# Allegro board SMA_fabB.brd
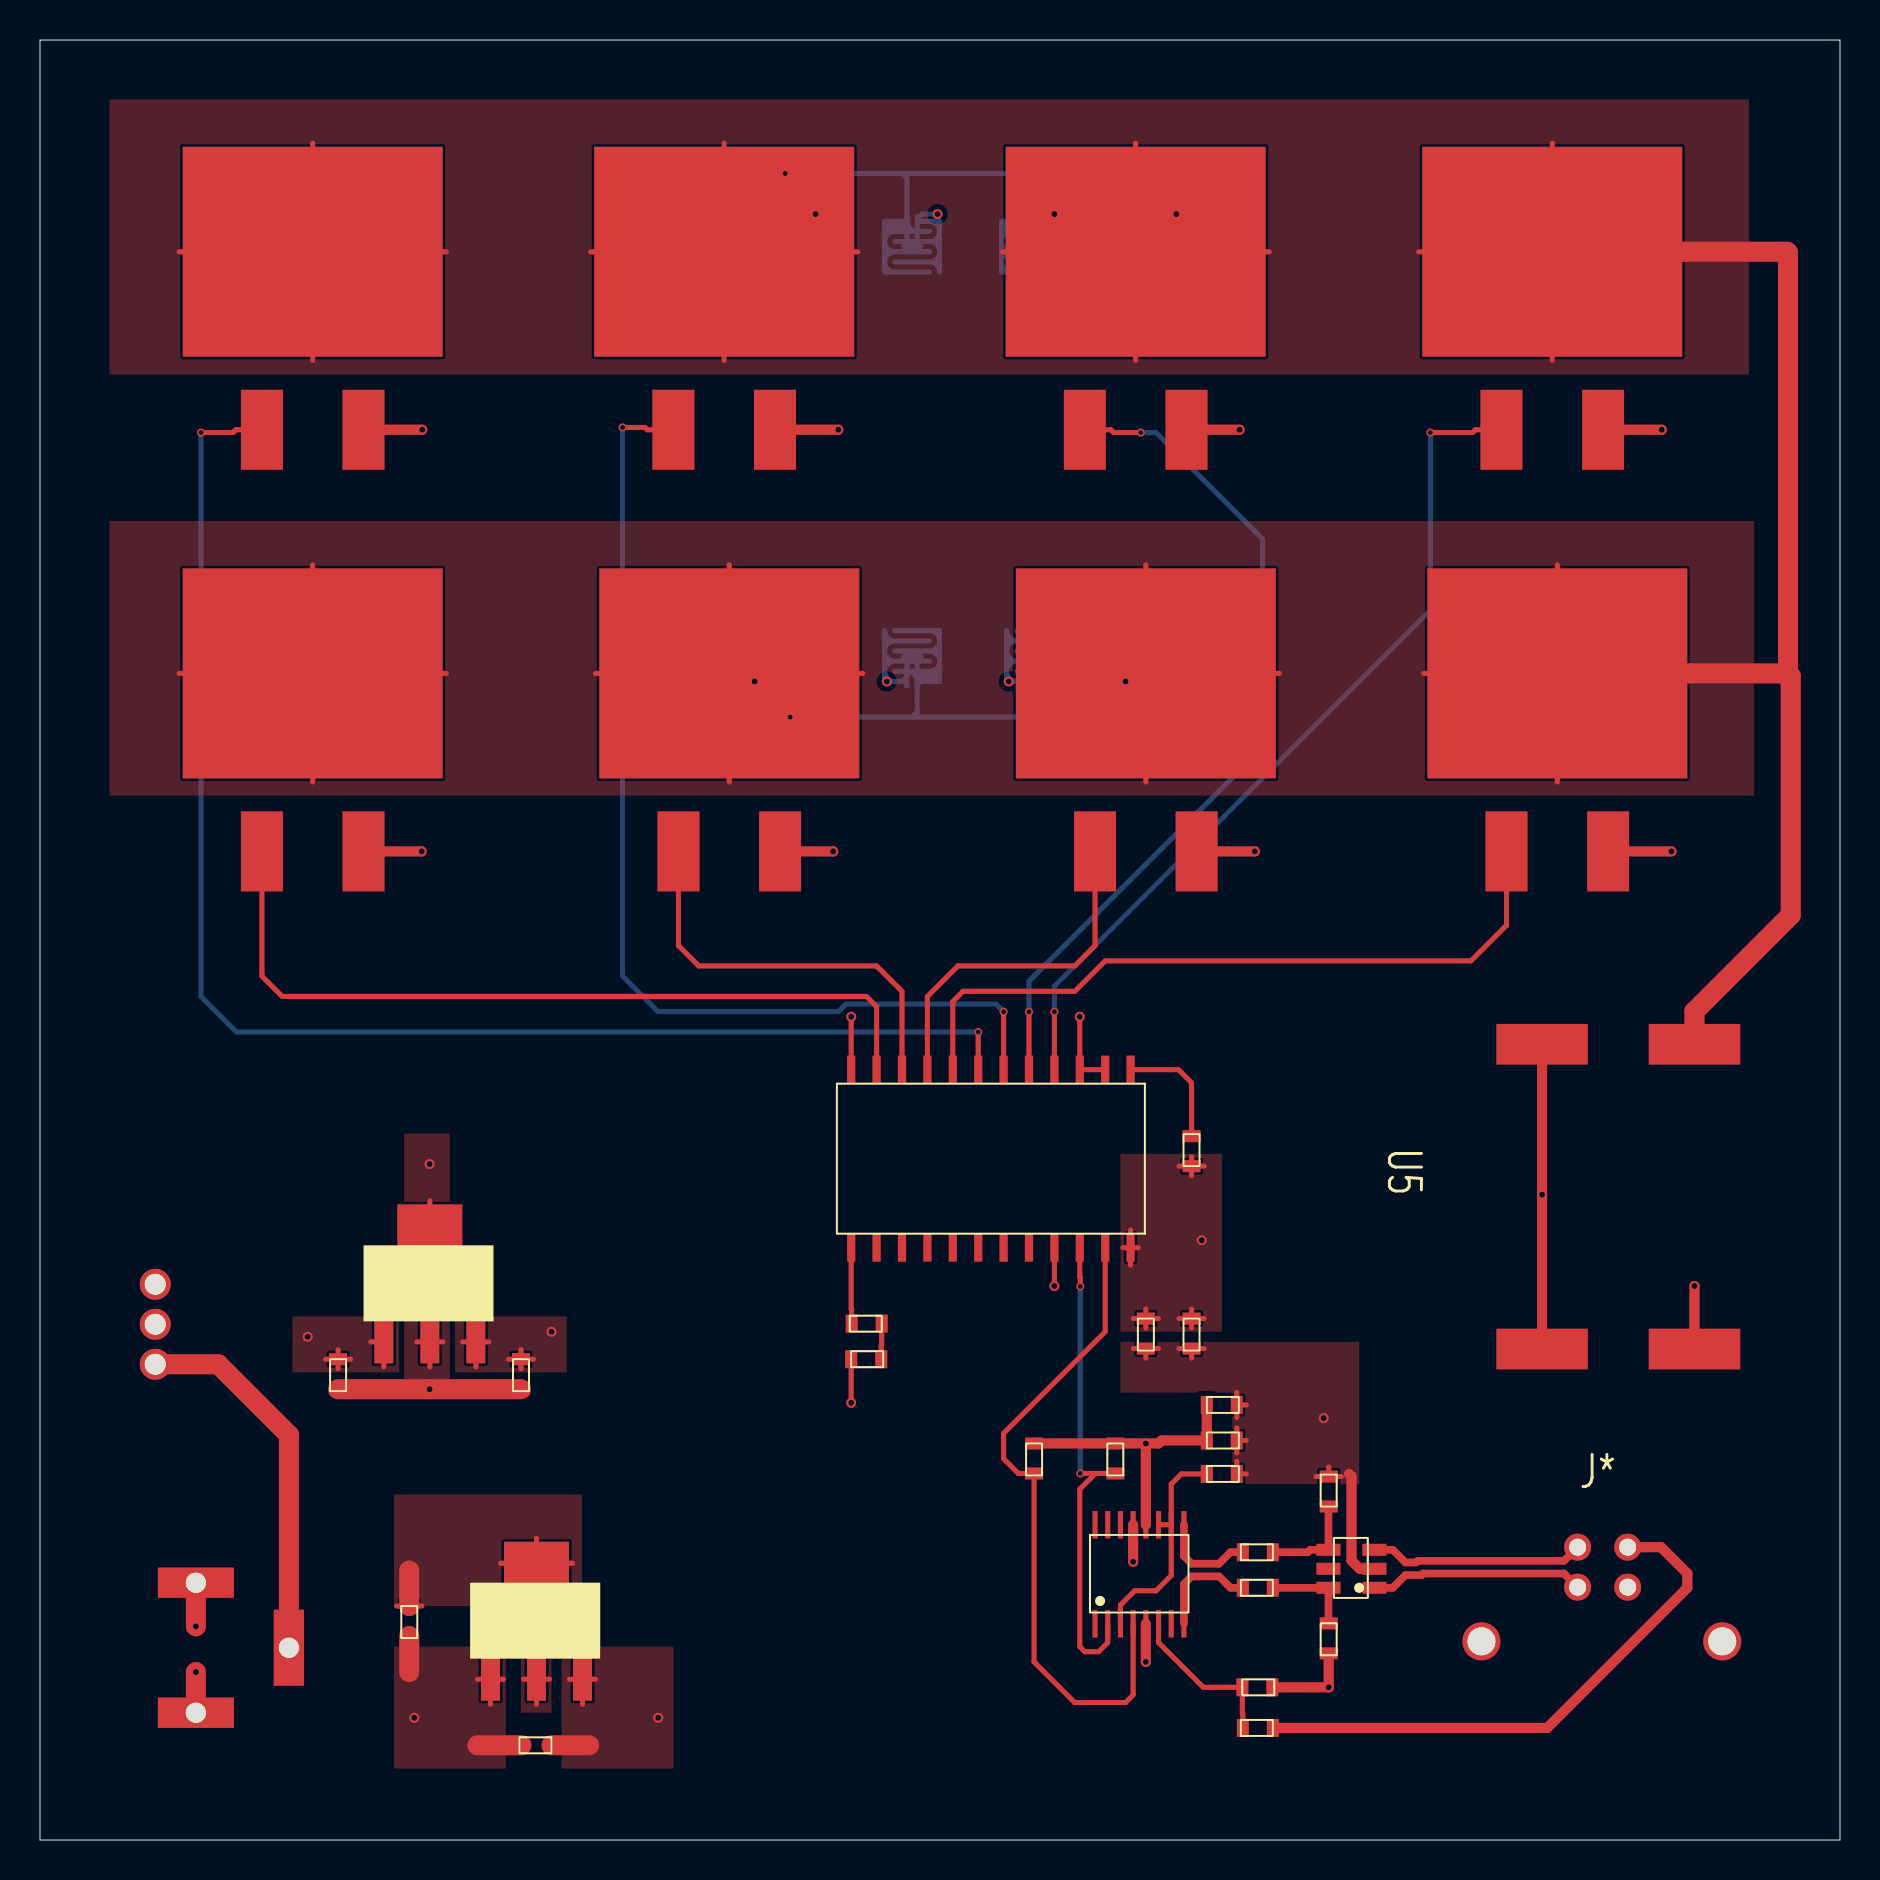
[diagram p0: board, top side]
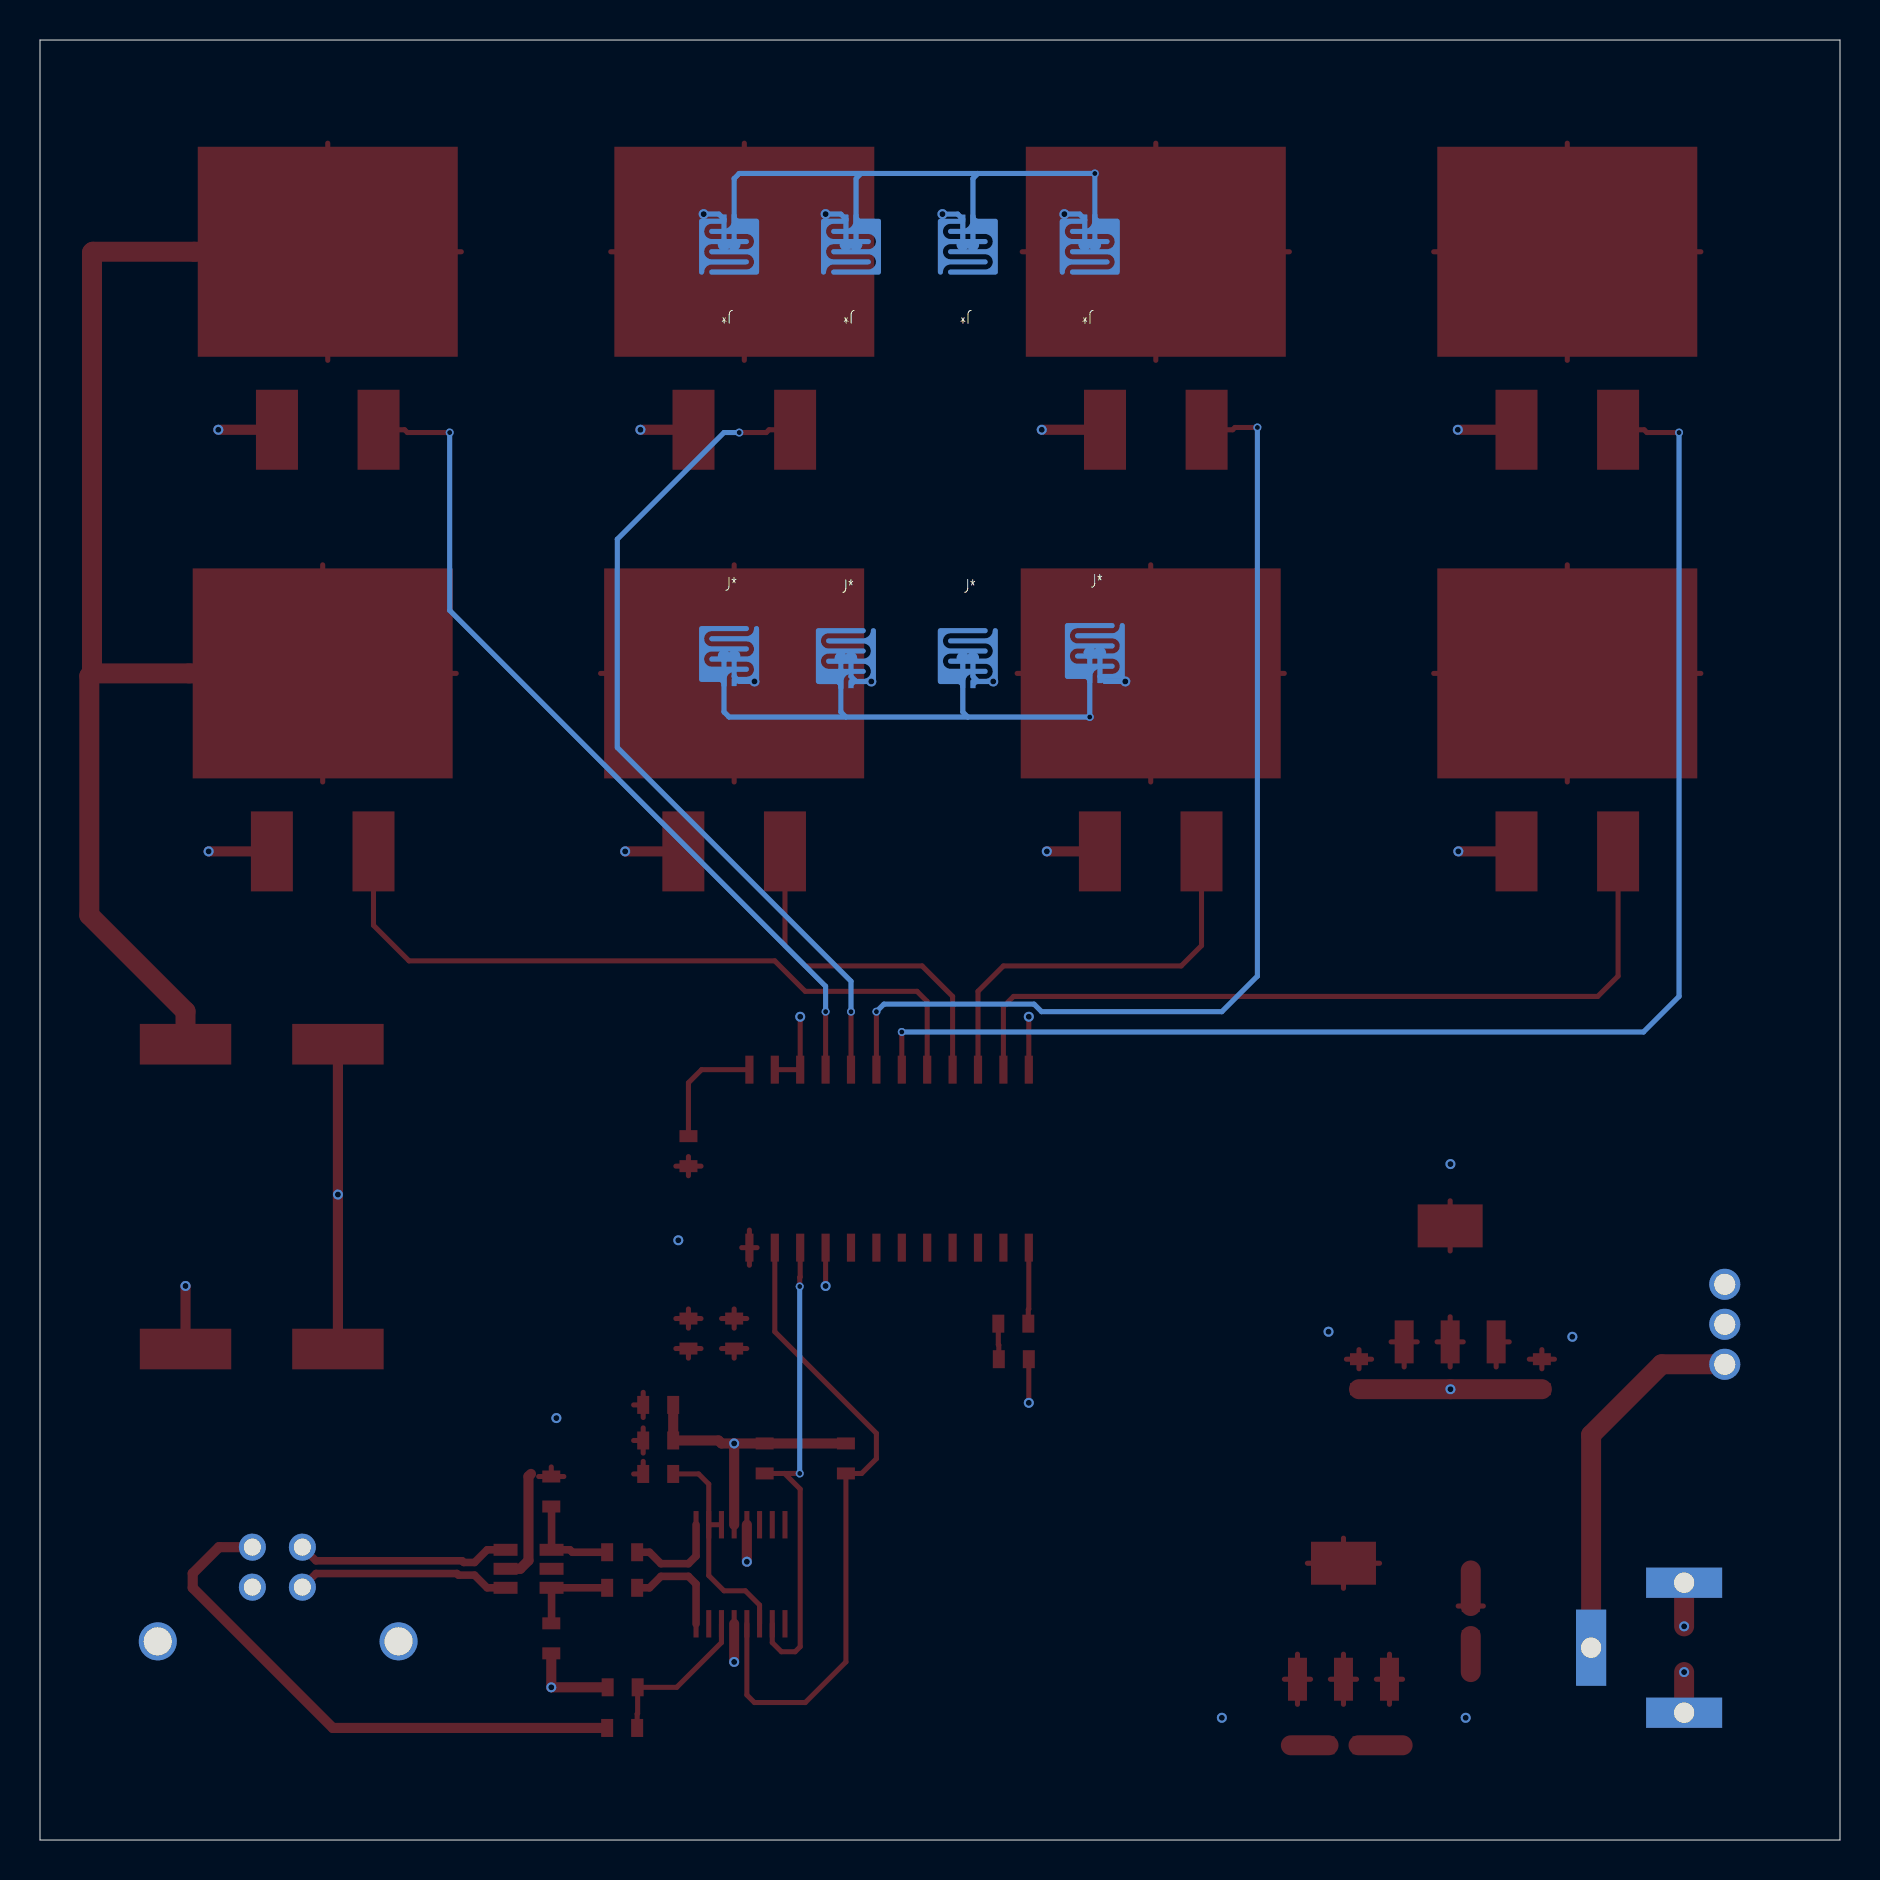
[diagram p1: board, bottom side, seen from below]

Outline 90 x 90 mm; copper layers: TOP, GND, VDD, BOTTOM. Coordinates in mm from the lower left corner of the outline.
Outline path: 0,90 90,90 90,0 0,0 0,90

## Design rules (mm)
constraint set DEFAULT: min track width 0.254, pair gap 0.5
net group USB: nets USB_D+ USB_D-
net group USB_CONN: nets USB_D+_CONN USB_D-_CONN
net group USB_FT: nets FT_D+ FT_D-

## Placement (name value [footprint] x y rotation side)
C5  0.33uF  [0603_R]  14.91 24.04 270 top
C6  0.1uF  [0603_R]  24.05 24.04 270 top
C7  1uF  [0603_R]  25.57 4.74 180 top
C8  1uF  [0603_R]  18.46 11.7 270 top
C9  47pF  [0603_R]  64.44 16.67 90 top
C10  47pF  [0603_R]  64.44 10.83 270 top
C11  47pF  [0603_R]  58.34 18.3 0 top
C12  4.7uF  [0603_R]  58.34 19.98 0 top
C13  0.1uF  [0603_R]  58.34 21.75 0 top
C16  1uF  [0603_R]  55.29 26.07 270 top
C17  0.1uF  [0603_R]  57.58 26.07 270 top
D2  -  [USBLC6-2SC6]  66.72 12.61 90 top
D4  LED  [0603_R]  40.56 24.04 0 top
J3  EJ503A_0  [EJ503A]  7.79 12.86 0 top
J4  OS102011MS2QN1_1  [OS102011MS2QN1]  5.76 23.79 90 top
J5  au-y1007  [AU-Y1007]  76.88 14.64 0 top
J6  comb_electrode  [COMB_ELECTRODE_FULL]  37.51 78.75 0 bottom
J7  comb_electrode  [COMB_ELECTRODE_FULL]  49.45 78.75 0 bottom
J8  comb_electrode  [COMB_ELECTRODE_FULL]  43.61 78.75 0 bottom
J9  comb_electrode  [COMB_ELECTRODE_FULL]  55.55 78.75 0 bottom
J10  comb_electrode  [COMB_ELECTRODE_FULL]  55.55 60.21 180 bottom
J11  comb_electrode  [COMB_ELECTRODE_FULL]  49.7 60.11 180 bottom
J12  comb_electrode  [COMB_ELECTRODE_FULL]  43.61 60.11 180 bottom
J13  comb_electrode  [COMB_ELECTRODE_FULL]  37.26 60.36 180 bottom
Q1  -  [STFW3N150]  75.61 79.41 0 top
Q2  -  [STFW3N150]  54.78 79.41 0 top
Q3  -  [STFW3N150]  34.21 79.41 0 top
Q4  -  [STFW3N150]  13.64 79.41 0 top
Q5  -  [STFW3N150]  13.64 58.33 0 top
Q6  -  [STFW3N150]  34.46 58.33 0 top
Q7  -  [STFW3N150]  55.29 58.33 0 top
Q8  -  [STFW3N150]  75.87 58.33 0 top
R3  27  [0603_R]  61.64 14.39 180 top
R4  27  [0603_R]  61.64 12.61 180 top
R5  4.7k  [0603_R]  61.64 5.6 180 top
R6  10k  [0603_R]  60.12 7.63 0 top
R7  10k  [0603_R]  53.77 19.83 270 top
R8  10k  [0603_R]  49.7 19.83 270 top
R12  1k  [0603_R]  57.58 33.69 90 top
R13  1k  [0603_R]  42.08 25.82 180 top
U3  -  [UA78M05CDCY]  17.19 24.91 0 top
U4  TLV1117LV33DCYT_1  [TLV1117LV33DCYT]  22.53 8.04 0 top
U5  -  [B00JVJDEZE]  80.18 39.79 270 top
U6  FT-201X  [FT201X]  52.75 15.76 0 top
U8  -  [PCF8575DW]  54.53 38.52 270 top

## Library data of the parts
C5-C13 C16 C17 = CAP
D2 = USBLC6-2SC6_1
D4 = LED
J3 = EJ503A_0
J4 = OS102011MS2QN1_1
J5 = au-y1007_0
J6-J13 = comb_electrode
Q1-Q8 = MOSFET N
R3-R8 R12 R13 = RESISTOR
U3 = UA78M05CDCY_0
U4 = TLV1117LV33DCYT_2
U5 = B00JVJDEZE
U6 = FT-201X_1
U8 = PCF8575DW

## Footprints (pads in the part's own frame, mm; a bottom-side part is the same pattern mirrored in y, then rotated)
0603_R
  rect 0.6x0.9 smd: 1(0,0) 2(1.5,0)
AU-Y1007
  round 1.9 hole 1.4: (-4.81,-4.71) (7.23,-4.71)
  round 1.35 hole 0.85: 1(2.5,0) 2(0,0) 3(0,-2) 4(2.5,-2)
B00JVJDEZE
  rect 2.032x4.572 smd: 1(15.24,2.54) 2(0,-5.08) 3(0,2.54) 4(15.24,-5.08)
COMB_ELECTRODE_FULL
  custom 2.492x3 smd: 1(-0.254,-1.016)
  custom 2.491x3 smd: 2(0.254,-1.016)
EJ503A
  rect 1.51x3.8 hole 1.01: 1(4.65,-3.25)
  rect 3.8x1.51 hole 1.01: 2(0,0) 3(0,-6.5)
FT201X
  rect 0.254x1.37 smd: 1(0,-4.953) 2(0.635,-4.953) 3(1.27,-4.953) 4(1.905,-4.953) 5(2.54,-4.953) 6(3.175,-4.953) 7(3.81,-4.953) 8(4.445,-4.953) 9(4.445,0) 10(3.81,0) 11(3.175,0) 12(2.54,0) 13(1.905,0) 14(1.27,0) 15(0.635,0) 16(0,0)
OS102011MS2QN1
  round 0 hole 1.75: (-2.1,0) (6.1,0)
  round 1.55 hole 1.05: 1(0,0) 2(2,0) 3(4,0)
PCF8575DW
  rect 1.4x0.41 smd: 1(0,0) 2(0,-1.27) 3(0,-2.54) 4(0,-3.81) 5(0,-5.08) 6(0,-6.35) 7(0,-7.62) 8(0,-8.89) 9(0,-10.16) 10(0,-11.43) 11(0,-12.7) 12(0,-13.97) 13(8.9,-13.97) 14(8.9,-12.7) 15(8.9,-11.43) 16(8.9,-10.16) 17(8.9,-8.89) 18(8.9,-7.62) 19(8.9,-6.35) 20(8.9,-5.08) 21(8.9,-3.81) 22(8.9,-2.54) 23(8.9,-1.27) 24(8.9,0)
STFW3N150
  rect 2.1x4 smd: 1(-2.54,-8.9) 3(2.54,-8.9)
  rect 13x10.5 smd: 2(0,0)
TLV1117LV33DCYT
  rect 0.95x2.15 smd: 1(0,0) 2(2.3,0) 3(4.6,0)
  rect 3.25x2.15 smd: 4(2.3,5.8)
UA78M05CDCY
  rect 0.95x2.15 smd: 1(0,0) 2(2.3,0) 3(4.6,0)
  rect 3.25x2.15 smd: 4(2.3,5.8)
USBLC6-2SC6
  rect 0.6x1.2 smd: 1(0,0) 2(0.95,0) 3(1.9,0) 4(1.9,2.3) 5(0.95,2.3) 6(0,2.3)

## Nets
+3V3: C8.1 U4.2 U4.4(VOUT_TAB)
+5V: C6.1 C7.1 C12.1 C13.1 C16.1 C17.1 D4.1 R7.1 R8.1 R12.1 U3.3(VOUT) U4.3 U5.1 U6.12 U8.24(VCC)
+12V: C5.1 J4.2 J4.3 U3.1
+12V_SW: J3.1 J4.1
GND: C5.2 C6.2 C7.2 C8.2 C9.2 C10.2 C11.2 C12.2 C13.2 C16.2 C17.2 D2.2 J3.2(V-) J3.3 J5.4 J6.2(-) J7.2(-) J8.2(-) J9.2(-) J10.2(-) J11.2(-) J12.2(-) J13.2(-) Q1.3(SOURCE) Q2.3(SOURCE) Q3.3(SOURCE) Q4.3(SOURCE) Q5.3(SOURCE) Q6.3(SOURCE) Q7.3(SOURCE) Q8.3(SOURCE) R6.2 U3.2 U3.4 U4.1 U5.2 U5.4(VOUT-) U6.5 U6.13 U8.2 U8.3 U8.12 U8.21
E0_ON: Q1.1 U8.4
E1_ON: Q2.1 U8.5
E2_ON: Q3.1 U8.6
E3_ON: Q4.1 U8.7
E4_ON: Q8.1 U8.8
E5_ON: Q7.1 U8.9
E6_ON: Q6.1 U8.10
E7_ON: Q5.1 U8.11
E9_ON: U8.14
E10_ON: U8.15
E11_ON: U8.16
E12_ON: U8.17
E13_ON: U8.18
E14_ON: U8.19
E15_ON: U8.20
FT_D+: R4.2 U6.8
FT_D-: R3.2 U6.9
I2C_SCL: R7.2 U6.2 U8.22
I2C_SDA: R8.2 U6.4 U8.23
USB_D+: C10.1 D2.6 R4.1
USB_D+_CONN: D2.1 J5.3
USB_D-: C9.1 D2.4 R3.1
USB_D-_CONN: D2.3 J5.2
V_STAT: J6.1 J7.1 J8.1 J9.1 J10.1 J11.1 J12.1 J13.1 Q1.2 Q2.2 Q3.2 Q4.2 Q5.2 Q6.2 Q7.2 Q8.2 U5.3
V_USB: D2.5(VBUS) J5.1(VCC) R5.1
N04930: R5.2 R6.1 U6.6
N05131: C11.1 U6.3(VCCIO) U6.10 U6.11
N09716: R12.2 U8.1
N09730: D4.2(CATHODE) R13.1
N09800: R13.2 U8.13

Pads without a net: U6 1 7 14 15 16

## Via types
v1: diameter 0.4, hole 0.25, TOP to BOTTOM, 12 vias
v2: diameter 0.5, hole 0.3, TOP to BOTTOM, 36 vias

## Routing (per net, layer and track width the routed paths; a pad name or vN(x,y) marks a point on that pad's centre or on a via; arc(x,y) is an arc through that point)
+3V3: length 13
  TOP w0.254: U4.2 25.48,8.04 ; U4.2 24.83,9.29 ; U4.2 24.17,8.04 ; U4.2 24.83,6.79 ; 19.09,11.7 C8.1 17.83,11.7 ; 24.83,12.59 U4.4 ; U4.4 24.83,15.09 ; U4.4 23.02,13.84 ; U4.4 26.63,13.84
  TOP w1: C8.1 18.46,13.48
+5V: length 39.5
  TOP w0.254: 21.14,24.91 U3.3 ; U3.3 21.79,23.65 ; U3.3 22.45,24.91 ; C17.1 58.21,26.07 ; C17.1 57.58,26.55 ; C17.1 57.58,25.59 ; C17.1 56.95,26.07 ; 54.15,29.62 U8.24 ; U8.24 54.91,29.62 ; U8.24 54.53,30.5 ; U8.24 54.53,28.74 ; 24.05,23.56 C6.1 ; C6.1 24.05,24.52 ; C6.1 24.68,24.04 ; C6.1 23.42,24.04 ; 26.47,8.04 U4.3 ; U4.3 27.13,6.79 ; U4.3 27.78,8.04 ; U4.3 27.13,9.29 ; C16.1 55.92,26.07 ; C16.1 55.29,26.55 ; C16.1 54.66,26.07 ; C16.1 55.29,25.59 ; 56.95,33.69 R12.1 ; R12.1 58.21,33.69 ; R12.1 57.58,33.21 ; R12.1 57.58,34.17 ; D4.1 v2(40.56,21.86)
  TOP w0.508: R8.1 R7.1 v2(55.29,19.83) ; U6.12 v2(55.29,19.83) ; v2(55.29,19.83) 55.92,19.83 56.07,19.98 C12.1 C13.1 ; U5.1 v2(82.72,27.7)
  TOP w1: C7.1 27.46,4.74
  vias: v2(25.57,25.41) v2(30.91,6.11) v2(58.09,29.99)
+12V: length 10.8
  TOP w0.254: 16.54,24.91 U3.1 17.19,23.65 ; 14.28,24.04 C5.1 ; C5.1 14.91,23.56 ; C5.1 14.91,24.52 ; C5.1 15.53,24.04
  VDD w0.254: 4.81,27.79 J4.3 ; J4.3 5.76,26.83 ; J4.3 6.72,27.79 ; J4.3 5.76,28.74 ; J4.2 6.72,25.79 ; J4.2 5.76,26.74 ; J4.2 4.81,25.79
  vias: v2(13.38,25.16)
+12V_SW: length 18.8
  TOP w1: J3.1 12.44,20.26 8.91,23.79 J4.1
GND: length 138.6
  TOP w0.254: 18.84,24.91 U3.2 ; U3.2 19.49,23.65 ; U3.2 20.15,24.91 ; U3.2 19.49,26.16 ; U4.1 22.53,9.29 ; U4.1 22.53,6.79 ; U4.1 23.18,8.04 ; U4.1 21.87,8.04 ; 59.84,19.35 C12.2 ; C12.2 59.84,20.6 ; C12.2 60.32,19.98 ; 63.81,18.17 C9.2 ; C9.2 64.44,18.65 ; C9.2 65.06,18.17 ; 54.66,24.57 C16.2 ; C16.2 55.29,24.09 ; C16.2 55.92,24.57 ; 59.84,21.13 C13.2 ; C13.2 59.84,22.38 ; C13.2 60.32,21.75 ; 57.58,24.09 C17.2 ; C17.2 56.95,24.57 ; C17.2 58.21,24.57 ; v2(51.99,41.16) U8.3 U8.2 ; U8.21 v2(50.72,27.7) ; 19.49,31.96 U3.4 19.49,29.45 ; 60.32,18.3 C11.2 59.84,18.93 ; U8.12 v2(40.56,41.16)
  TOP w0.504: U6.5 v2(55.29,8.9)
  TOP w0.508: C10.2 v2(64.44,7.63) R6.2 ; 65.45,18.3 65.58,18.18 65.58,13.97 65.99,13.56 D2.2 ; Q5.3 v2(19.08,49.43) ; U5.4 v2(75.1,32.27) U5.2 ; Q8.3 v2(81.57,49.43) ; Q3.3 v2(39.91,70.51) ; Q6.3 v2(39.66,49.43) ; Q4.3 v2(19.11,70.51) ; U6.13 v2(54.66,13.91) ; Q2.3 v2(59.98,70.51) ; Q7.3 v2(60.74,49.43) ; Q1.3 v2(81.09,70.51)
  TOP w1: C7.2 21.87,4.74 ; C5.2 v2(19.48,22.54) C6.2 ; C8.2 18.46,8.4 ; J3.2 v2(7.79,10.68) ; J3.3 v2(7.79,8.4)
  GND w0.254: J3.2 7.79,13.8 ; J3.2 5.72,12.86 ; J3.2 7.79,11.93 ; J3.2 9.87,12.86 ; J3.3 9.87,6.36 ; J3.3 7.79,5.43 ; J3.3 7.79,7.3 ; J3.3 5.72,6.36 ; 79.38,11.79 J5.4 ; J5.4 78.53,12.64 ; J5.4 80.23,12.64 ; J5.4 79.38,13.49
  GND w1: 13.49,17.69 13.38,17.69 13.38,11.19
  BOTTOM w0.254: J11.2 49.45,58.18 49.2,57.93 v2(48.43,57.93) ; J10.2 55.29,58.18 55.04,57.93 v2(54.28,57.93) ; J13.2 37,58.18 36.75,57.93 v2(35.73,57.93) ; v2(50.72,81.29) 49.96,81.29 49.7,81.04 J7.2 ; J9.2 55.8,81.04 56.05,81.29 v2(56.82,81.29) ; J12.2 43.35,58.18 43.1,57.93 v2(42.34,57.93) ; v2(44.88,81.29) 44.12,81.29 43.86,81.04 J8.2 ; J6.2 37.77,81.04 38.02,81.29 v2(38.78,81.29)
  vias: v2(18.72,6.11) v2(19.48,33.8) v2(64.18,21.1)
E0_ON: length 43.3
  TOP w0.254: U8.4 v1(50.72,41.42) ; v1(69.52,70.37) 71.63,70.37 71.77,70.51 Q1.1
  BOTTOM w0.254: v1(69.52,70.37) 69.52,61.48 50.72,42.69 v1(50.72,41.42)
E1_ON: length 42.5
  TOP w0.254: U8.5 v1(49.45,41.42) ; v1(55.04,70.37) 53.69,70.37 53.55,70.51 Q2.1
  BOTTOM w0.254: v1(49.45,41.42) 49.45,42.94 61.13,54.62 61.13,65.04 55.8,70.37 v1(55.04,70.37)
E2_ON: length 53
  TOP w0.254: U8.6 v1(48.18,41.42) ; v1(29.13,70.63) 30.25,70.63 30.37,70.51 Q3.1
  BOTTOM w0.254: v1(29.13,70.63) 29.13,43.19 30.91,41.42 39.92,41.42 40.3,41.79 47.8,41.79 v1(48.18,41.42)
E3_ON: length 72.8
  TOP w0.254: v1(8.05,70.37) 9.65,70.37 9.79,70.51 Q4.1 ; U8.7 v1(46.91,40.4)
  BOTTOM w0.254: v1(8.05,70.37) 8.05,42.18 9.83,40.4 v1(46.91,40.4)
E4_ON: length 36.4
  TOP w0.254: Q8.1 73.33,45.73 71.55,43.96 53.26,43.96 51.74,42.43 46.15,42.43 45.64,41.92 U8.8
E5_ON: length 17.8
  TOP w0.254: Q7.1 52.75,44.72 51.74,43.7 45.89,43.7 44.37,42.18 U8.9
E6_ON: length 20.7
  TOP w0.254: U8.10 43.1,42.43 41.83,43.7 32.94,43.7 31.92,44.72 Q6.1
E7_ON: length 40.8
  TOP w0.254: Q5.1 11.1,43.19 12.11,42.18 41.32,42.18 41.83,41.67 U8.11
FT_D+: length 5.3
  TOP w0.381: R4.2 59.52,12.61 58.95,13.18 57.58,13.18 57.2,12.8 U6.8
FT_D-: length 4.9
  TOP w0.381: R3.2 59.52,14.39 58.95,13.82 57.58,13.82 57.2,14.2 U6.9
I2C_SCL: length 24.7
  TOP w0.254: U8.22 51.99,28.15 52.01,28.13 v1(52.01,27.68) ; 52.77,18.33 51.99,17.55 51.99,9.67 52.24,9.41 52.93,9.41 53.39,9.87 53.39,10.81 ; 52.77,18.33 v1(52.01,18.33) ; 52.77,18.33 R7.2
  BOTTOM w0.254: v1(52.01,18.33) v1(52.01,27.68)
I2C_SDA: length 33.4
  TOP w0.254: U6.4 54.66,7.25 54.28,6.87 51.74,6.87 49.7,8.9 R8.2 48.92,18.33 48.18,19.06 48.18,20.33 53.26,25.41 U8.23
USB_D+: length 4.6
  TOP w0.381: C10.1 64.42,10.85 D2.6 R4.1
USB_D+_CONN: length 10.7
  TOP w0.381: D2.1 67.64,12.61 68.27,13.24 69.07,13.24 69.16,13.32 76.2,13.32 J5.3
USB_D-: length 5
  TOP w0.381: C9.1 64.42,16.66 D2.4 63.5,14.51 63.38,14.39 R3.1
USB_D-_CONN: length 10.7
  TOP w0.381: J5.2 76.2,13.96 68.89,13.96 68.81,13.88 68.27,13.88 67.64,14.51 D2.3
V_STAT: length 301.4
  TOP w0.254: 48.11,79.41 Q2.2 ; Q2.2 61.46,79.41 ; Q2.2 54.78,73.98 ; Q2.2 54.78,84.84 ; Q8.2 75.87,63.76 ; Q8.2 75.87,52.9 ; Q8.2 69.19,58.33 ; 13.64,52.9 Q5.2 ; Q5.2 6.96,58.33 ; Q5.2 20.31,58.33 ; Q5.2 13.64,63.76 ; 68.93,79.41 Q1.2 ; Q1.2 75.61,84.84 ; Q1.2 75.61,73.98 ; 27.53,79.41 Q3.2 ; Q3.2 34.21,84.84 ; Q3.2 34.21,73.98 ; Q3.2 40.89,79.41 ; Q6.2 34.46,63.76 ; Q6.2 27.79,58.33 ; Q6.2 34.46,52.9 ; Q6.2 41.14,58.33 ; 55.29,52.9 Q7.2 ; Q7.2 61.97,58.33 ; Q7.2 55.29,63.76 ; 13.64,73.98 Q4.2 ; Q4.2 13.64,84.84 ; Q4.2 6.96,79.41 ; Q4.2 20.31,79.41
  TOP w1: 87.4,58.33 87.54,58.2 87.54,46.24 82.72,41.43 U5.3 ; 87.4,58.33 87.4,79.37 87.36,79.41 Q1.2 ; 87.4,58.33 Q8.2
  BOTTOM w0.254: J7.1 49.2,83.07 48.94,83.33 ; J9.1 55.29,83.07 55.04,83.33 48.94,83.33 ; J11.1 49.96,56.4 49.7,56.15 ; 49.7,56.15 55.55,56.15 55.8,56.4 J10.1 ; 49.7,56.15 43.61,56.15 ; 43.1,83.33 48.94,83.33 ; 43.1,83.33 43.35,83.07 J8.1 ; 43.1,83.33 v1(37.26,83.33) J6.1 ; 43.61,56.15 v1(37.51,56.15) J13.1 ; 43.61,56.15 43.86,56.4 J12.1
V_USB: length 27.9
  TOP w0.508: J5.1 81.05,14.64 82.36,13.33 82.36,12.61 75.36,5.6 R5.1
N04930: length 8.1
  TOP w0.254: U6.6 55.93,9.87 58.16,7.63 R6.1 60.12,6.33 60.14,6.31 R5.2
N05131: length 11.3
  TOP w0.254: U6.3 54.02,11.75 54.73,12.46 55.8,12.46 56.56,13.22 U6.10 ; U6.10 56.56,17.79 57.07,18.3 C11.1 ; U6.10 U6.11
N09716: length 6
  TOP w0.254: U8.1 56.92,38.52 57.58,37.86 R12.2
N09730: length 1.8
  TOP w0.254: R13.1 42.08,24.77 42.06,24.74 D4.2
N09800: length 3.8
  TOP w0.254: U8.13 40.56,26.55 40.58,26.52 R13.2

## Copper pours and planes (outline as drawn; the poured copper is in the pictures)
+3V3 on TOP: 24.05,6.36 24.05,11.7 17.7,11.7 17.7,17.29 27.1,17.29 27.1,11.7 25.57,11.7 25.57,6.36
+5V on TOP: 59.1,25.41 59.1,34.3 54.02,34.3 54.02,25.41
+5V on TOP: 20.75,26.18 20.75,23.38 26.34,23.38 26.34,26.18
+5V on TOP: 26.08,3.57 26.08,9.67 31.67,9.67 31.67,3.57
+5V on VDD: 15.34,0 15.34,17.79 20.49,17.79 20.49,33.29 90,33.29 90,0
+12V on TOP: 17.95,26.18 17.95,23.38 12.62,23.38 12.62,26.18
+12V on VDD: 0,0 0,33.29 17.72,33.29 17.72,18.56 14.14,18.56 14.14,0
GND on TOP: 18.21,22.11 18.21,35.32 20.49,35.32 20.49,22.11
GND on TOP: 17.7,3.57 17.7,9.67 23.29,9.67 23.29,3.57
GND on TOP: 59.61,17.79 59.61,22.37 54.02,22.37 54.02,24.91 65.96,24.91 65.96,17.79
GND on GND: 0,90 0,0 90,0 90,90
V_STAT on TOP: 3.48,87.03 3.48,73.27 85.45,73.27 85.45,87.03
V_STAT on TOP: 3.48,65.95 3.48,52.22 85.71,52.22 85.71,65.95

## Text on the board
User.Comments: 02/17/18 | DATE | 0.1 | REV | FAB A RELEASE | DESCRIPTION | AUTHOR | zq2154 | SMA | CREATIVE MACHINES LAB | A
XSECTION_CHART: *  SURFACE | L1 TOP CONDUCTOR | *  DIELECTRIC | L2 GND CONDUCTOR | L3 VDD CONDUCTOR | L4 BOTTOM CONDUCTOR | DESIGN CROSS SECTION CHART | ___________________________ | TOTAL THICKNESS 0.73152 MM | 1-4
PAGE_OUTLINE: Materials provided to you regarding Creative Machines Lab's | product designs are confidential and considered intellectual | property. They may not be shared without our permission. | COMPANY: | TITLE: | CONFIDENTIALITY REMINDER: | FAB:
